# Altium PCB Li-IonBatteryCharger.PcbDoc
Units mil, origin at the board's own origin, x right, y up, seen from the top; angles counter-clockwise.
Board outline 4268 x 1430 mil, 2 copper layers (Top Layer, Bottom Layer); 53 components, 36 nets, 254 pads, 41 vias.
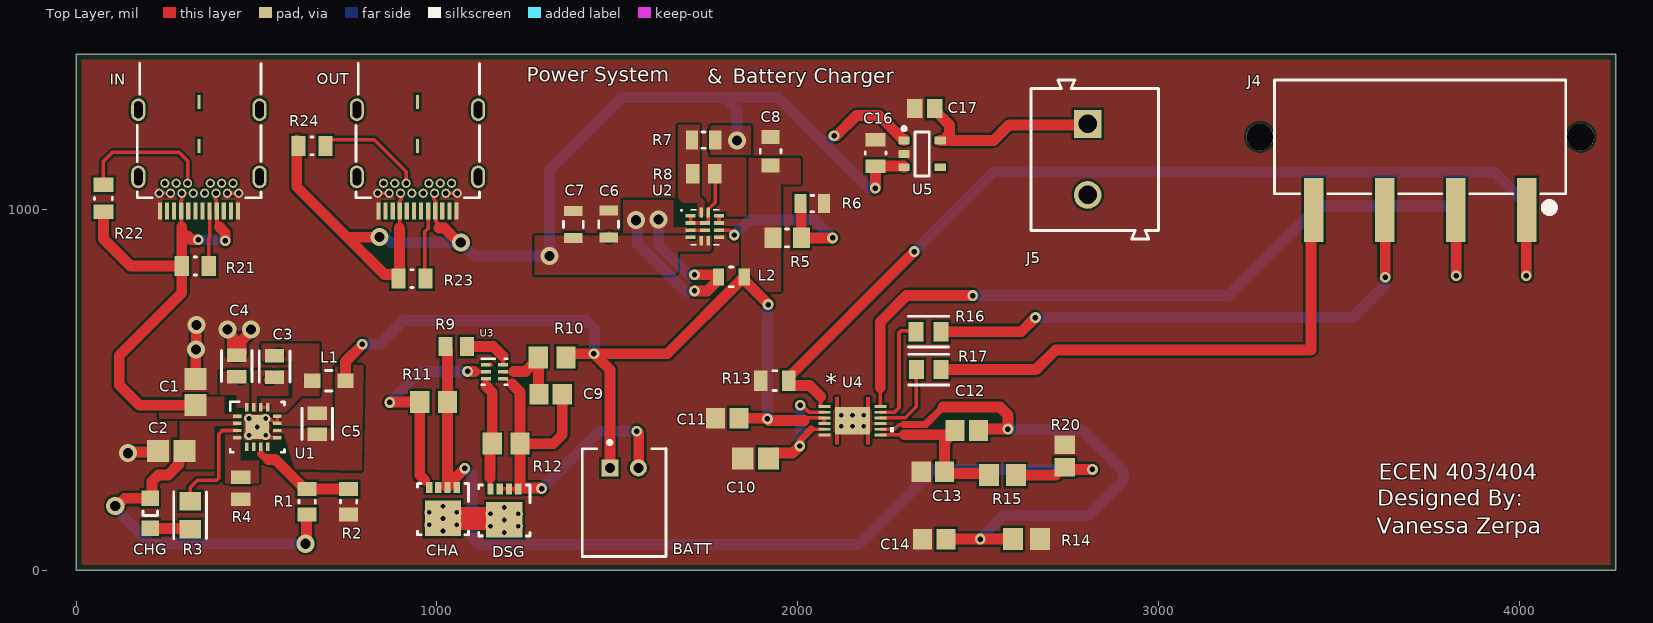
[diagram p0: Top Layer view]
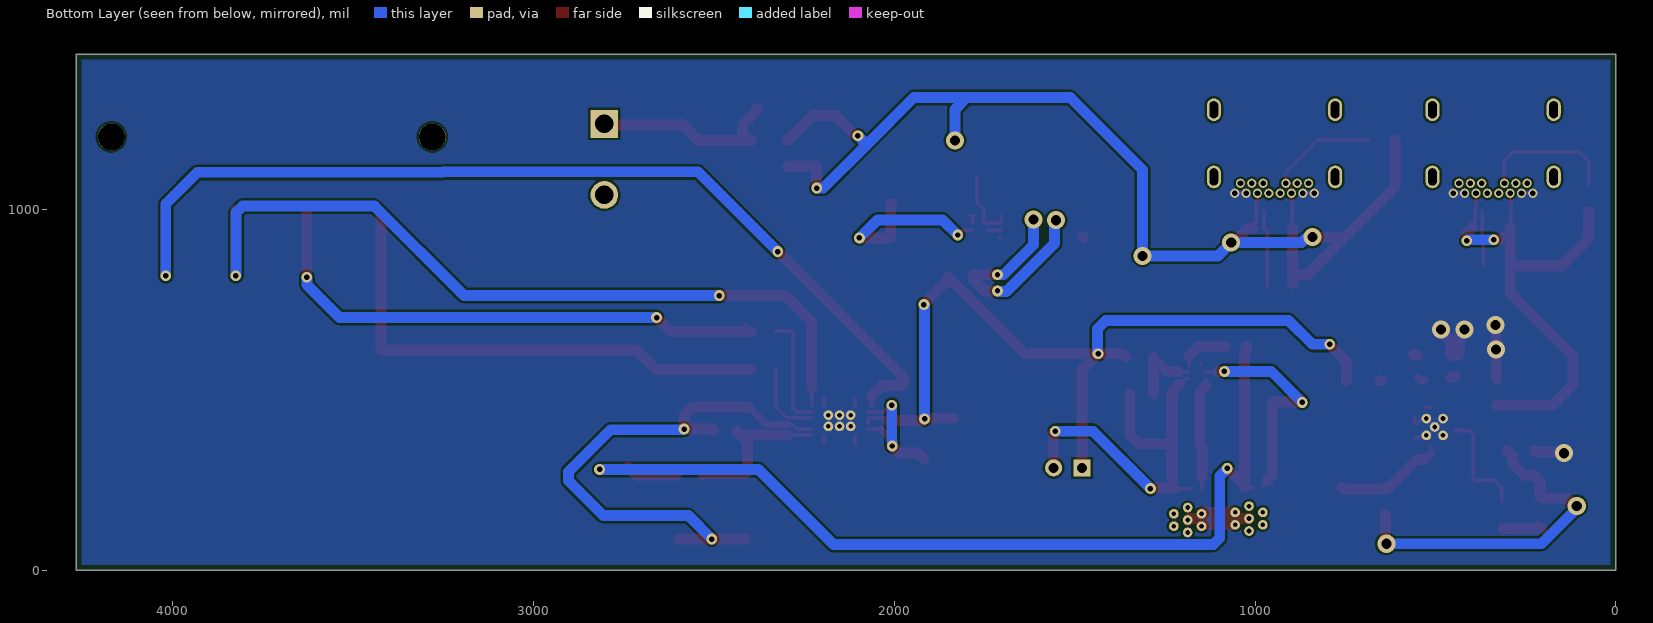
[diagram p1: Bottom Layer view, seen from below]

## Layer stack, top to bottom
Top Solder: solder mask 0.4, Solder Resist, Dk 3.5
Top Layer: signal copper 1.4
Dielectric 1: dielectric 12.6, FR-4, Dk 4.8
Bottom Layer: signal copper 1.4
Bottom Solder: solder mask 0.4, Solder Resist, Dk 3.5

## Board outline
0,0 4268,0 4268,1430 0,1430

## Design rules (kind name [scope] priority, off if disabled: settings)
BoardOutlineClearance [All] p1: gap=15 ignorepadtopadclearanceinfootprint=FALSE
Clearance [All] p1: gap=6 ignorepadtopadclearanceinfootprint=TRUE except(0: Arc-Hole Track-Hole SMDPad-Hole THPad-Hole Via-Hole Fill-Hole Poly-Hole Region-Hole Text-Hole)
ComponentClearance [All] p1: gap=1 collisioncheckmode=3 verticalgap=1 showdistances=FALSE
DiffPairsRouting [All] p1: maxlimit=393.7 minlimit=6 mostfreqgap=8 toplayer_minwidth=6 toplayer_maxwidth=15 toplayer_prefwidth=8 bottomlayer_minwidth=6 bottomlayer_maxwidth=15 bottomlayer_prefwidth=8 maxuncoupledlength=500
HoleSize [All] p1: absolutevalues=TRUE maxlimit=265 minlimit=13 maxpercent=80.000 minpercent=20.000
HoleToHoleClearance [All] p1: gap=10 allowstackedmicrovias=FALSE
MinimumAnnularRing [All] p1: minimumring=4.9
MinimumSolderMaskSliver [All] p1: minsoldermaskwidth=0
PlaneClearance [All] p1: clearance=10
PlaneConnect [All] p1: planeconnectstyle=Direct reliefexpansion=16 reliefentries=4 reliefconductorwidth=6 reliefairgap=6
PolygonConnect [All] p1: connectstyle=Direct reliefconductorwidth=8 reliefentries=4 polygonreliefangle="90 Angle" airgapwidth=6
RoutingCorners [All] p1: cornerstyle=45-Degree minsetback=49.21 maxsetback=49.21
RoutingVias [All] p1: holewidth=15 width=30 viastyle="Through Hole" minholewidth=13 minwidth=27 maxholewidth=100 maxwidth=114
SilkToSilkClearance [All] p1: silktosilkclearance=0
SilkToSolderMaskClearance [IsPad] p1: minsilkscreentomaskgap=6 clearancetoexposedcopper=TRUE
SolderMaskExpansion [All] p1: expansion=2.95 istentingtop=FALSE
Width [All] p1: maxlimit=400 minlimit=6 preferedwidth=8
Width PowerNets [InNetClass('PowerNets')] p2: maxlimit=50 minlimit=10 preferedwidth=20 minimp=50.000000 maximp=50.000000 favimp=50.000000
20 further rules are at their usual default settings.

## Classes and differential pairs
net class PowerNets: GND NetBATT_1 NetCHA_1 NetL2_2 "PWR IN" VOUT
component class "Boost Converter": C6 C7 C8 C16 C17 J5 L2 OUT R5 R6 R7 R8 R23 R24 U2 U5
component class "Battery Protection": BATT C9 CHA DSG R9 R10 R11 R12 U3
component class "Battery Fuel Gauge": C10 C11 C12 C13 C14 J4 R13 R14 R15 R16 R17 R20 U4
component class "Battery Charger": C1 C2 C3 C4 C5 CHG IN L1 R1 R2 R3 R4 R21 R22 U1

## Components (designator, comment, footprint, x,y, rotation, side; value= is the part's Value field where it differs from the comment)
BATT "BAT-" JST-S2B-PH-K-S_V 1519,187 r0 top
C1 "2.2uF" CAPC2013X152X50ML20T25 330,493.58 r270 top
C2 "2.2uF" CAPC2013X152X50ML20T25 263.58,330 r0 top
C3 "47nF" FP-C0805C-DN-MFG 549.68,564.53 r270 top value="47,000 pF"
C4 "10uF" FP-C0805C-DG-MFG 445,565.47 r270 top
C5 "10uF" FP-C0805C-DG-MFG 668,405.47 r90 top
C6 "22uF" FP-GRM21B-0_15-MFG 1476,959 r90 top
C7 "22uF" FP-GRM21B-0_15-MFG 1378,958.42 r90 top
C8 "4.7uF" FP-0805-L_2_01_0_2-W_1_25-MFG 1925,1161.37 r90 top
C9 "100nF" CAPC2013X94X50NL20T25 1315,488 r180 top
C10 "470nF" CAPC2013X140X50ML20T25 1883.57,309 r0 top
C11 "100nF" CAPC2013X94X50NL20T25 1805,421 r0 top
C12 "100nF" CAPC2013X94X50NL20T25 2468.52,387 r0 top
C13 "100nF" CAPC2013X94X50NL20T25 2375,273 r180 top
C14 "100nF" CAPC2013X94X50NL20T25 2378.4,86 r0 top
C16 "1uF" FP-CC0805-0_85-MFG 2216,1156.58 r90 top value="1 uF"
C17 "2.7 uF" CAPC2013X145X50LL20T25 2352.44,1280 r180 top
CHA "CSD16406Q3" DQG0008A#1 1016.61,168.9 r270 top
CHG "CHG" 0805_A 205,157.66 r90 top
DSG "CSD16406Q3" DQG0008A#2 1186.61,164.96 r270 top
IN "632723100011" 632723100011 340,1229.1 r180 top
J4 "Screw top terminal" 691709710304 3726,1201 r180 top
J5 "691101710002" 691101710002 2823.69,1138.57 r270 top
L1 "1uH" FP-LQM21DN_00-MFG 700,525 r0 top
L2 "1.2uH" FP-LQW21HN_00-MFG 1816,813 r180 top
OUT "632723100011" 632723100011 946,1229.1 r180 top
R1 "10k" RESC2013X60X35NL10T20 640,189.57 r270 top
R2 "10k" RESC2013X60X35NL10T20 755,189.57 r90 top
R3 "1k" FP-CRCW0805-HPe3-IPC_A 315.71,152 r90 top
R4 "13.3k" RESC2013X70X40LL20T20 456,226.49 r90 top
R5 "100k" RESC2013X60X35ML10T20 1970.63,921 r180 top
R6 "63.4k" RESC2013X50X30LL20T20 2040.52,1016 r180 top
R7 "750k" RESC2013X50X30LL20T20 1739,1192 r0 top
R8 "143k" RESC2013X70X40LL20T20 1739.49,1099 r180 top
R9 "2.2k" RESC2013X60X40LL20T25 1053.47,620 r0 top
R10 "330" RESC2013X70X40ML20T20 1319,590 r0 top
R11 "5.1M" RESC2013X70X40ML20T20 990.61,466 r180 top
R12 "5.1M" RESC2013X70X40ML20T20 1191.64,350.44 r0 top
R13 "1.8M" FP-CRCW0805-e3-MFG 1936.61,525 r0 top
R14 "100" RESC2013X60X40ML20T25 2634,86 r0 top
R15 "100" RESC2013X60X40ML20T25 2567.4,263 r0 top
R16 "10k" FP-CR0805-IPC_B 2363,661 r0 top
R17 "10k" FP-CR0805-IPC_B 2363.47,556 r0 top
R20 ".01" RESC2013X75X55NL20T20 2740,316.5 r90 top
R21 "56k" FP-CRCW0805-e3-IPC_B 330,843 r0 top
R22 "56k" FP-CRCW0805-e3-IPC_B 75,1030.56 r90 top
R23 "56k" FP-CRCW0805-e3-IPC_B 931,808 r0 top
R24 "56k" FP-CRCW0805-e3-IPC_B 653.56,1176 r0 top
U1 "BQ25303JRTER" RTE0016C 501.77,396.77 r0 top
U2 "MP3423" MP3422GGZ 1742.63,952.47 r0 top
U3 "BQ29700DSER" DSE0006A 1160,550 r0 top
U4 "BQ27510DRZR" DRZ12_1P95X2P45 2152,414 r0 top
U5 "TPS76030DBVR" DBV0005A_L 2345,1154 r0 top

## Footprints (in the part's own frame and the unit in brackets; to place one, negate y for a bottom-side part, rotate by r counter-clockwise, add the part's x,y. Pads: shape width x height; smd on the part's side, far side on the other; paste and mask are expansions set on the pad)
0805_A [mm] "Chip LED, 2-Leads, Body 2.0x1.3mm, IPC Medium Density"
  rect 1.1x1.2 smd: 1(-1.05,0) 2(1.05,0)
  silkscreen extent -0.15,-0.5 0.15,0.5, body extent -1,-0.62 1,0.63, height 0.68
632723100011 [mm] "USB 3.1 Type C Receptacle Horizontal THR"
  rect 0.3x1.2 smd: A1(-2.75,5.93) A2(-2.25,5.93) A3(-1.75,5.93) A4(-1.25,5.93) A5(-0.75,5.93) A6(-0.25,5.93) A7(0.25,5.93) A8(0.75,5.93) A9(1.25,5.93) A10(1.75,5.93) A11(2.25,5.93) A12(2.75,5.93)
  round 0.65 hole 0.4: B1(2.8,4.68) B2(2.4,3.98) B3(1.6,3.98) B4(1.2,4.68) B5(0.8,3.98) B6(0.4,4.68) B7(-0.4,4.68) B8(-0.8,3.98) B9(-1.2,4.68) B10(-1.6,3.98) B11(-2.4,3.98) B12(-2.8,4.68) G1(2,4.68) G2(-2,4.68)
  oval 1x1.6 hole 0.6 slot 1.2 at 90 deg: Shell(-4.27,3.53) Shell(-4.27,-1.2) Shell(4.27,3.53) Shell(4.27,-1.2)
  rect 0.2x1 smd: Shell(0,1.35) Shell(0,-1.75)
  silkscreen extent -4.37,-4.45 4.34,5, body extent -4.37,-5.6 4.37,6.19, height 3.05
691101710002 [mm] "5,00mm - modular - blue - Horizontal entry with pressure clamp - 12,6mm height - 02p"
  rect 1.95x1.95 hole 1.3: 1(-2.5,-0.5)
  round 1.95 hole 1.3: 2(2.5,-0.5)
  silkscreen extent -5.6,-4.5 5.6,4.5, body extent -5.6,-4.5 5.6,4.5, height 12.65
691709710304 [mm] "Horizontal Entry SMT with Pressure Clamp, pitch 5mm, 04p"
  rect 1.4x4.5 smd: 1(-7.5,5.15) 2(-2.5,5.15) 3(2.5,5.15) 4(7.5,5.15)
  round 1.9 hole 1.9 unplated: M1(-11.3,0) M2(11.3,0)
  silkscreen extent -10.25,-4 10.25,5.17, body extent -12,-4 12,7, height 9.95
CAPC2013X94X50NL20T25 [mm] "Chip Capacitor, 2-Leads, Body 2.01x1.25mm, IPC Medium Density"
  rect 1.35x1.45 smd: 1(-0.825,0) 2(0.825,0)
  body extent -1.1,-0.72 1.11,0.72, height 0.94
CAPC2013X140X50ML20T25 [mm] "Chip Capacitor, 2-Leads, Body 2.00x1.25mm, IPC Low Density"
  rect 1.5x1.55 smd: 1(-0.9,0) 2(0.9,0)
  body extent -1.1,-0.72 1.1,0.72, height 1.4
CAPC2013X145X50LL20T25 [mm] "Chip Capacitor, 2-Leads, Body 2.00x1.25mm, IPC High Density"
  rect 1.1x1.35 smd: 1(-0.7,0) 2(0.7,0)
  body extent -1.1,-0.72 1.1,0.72, height 1.45
CAPC2013X152X50ML20T25 [mm] "Chip Capacitor, 2-Leads, Body 2.01x1.25mm, IPC Low Density"
  rect 1.55x1.55 smd: 1(-0.925,0) 2(0.925,0)
  body extent -1.1,-0.72 1.11,0.72, height 1.52
DBV0005A_L [mm] "SOT23, 5-Leads, Body 3.05x1.75mm, Pitch 0.95mm, IPC High Density"
  rrect18% 0.8x0.55 smd: 1(-1.275,0.95) 2(-1.275,0) 3(-1.275,-0.95) 4(1.275,-0.95) 5(1.275,0.95)
  silkscreen extent -1.4,-1.55 0.5,1.9, body extent -1.42,-1.46 1.42,1.46, height 1.08
DQG0008A#1 [mm]
  rect 0.75x0.44 smd paste-0.05 mask-0.051: 1(-1.525,0.975) 2(-1.525,0.325) 3(-1.525,-0.325) 4(-1.525,-0.975) 5(1.525,-0.975) 6(1.525,-0.325) 7(1.525,0.325) 8(1.525,0.975)
  rect 2.5x2.55 smd paste-1.262 mask-1.257: 9(0.65,0)
  round 0.686 hole 0.33: V(-0.212,0)
  round 0.686 hole 0.33 mask-0.102: V(0.226,0.975) V(1.102,0.975) V(1.102,-0.975)
  round 0.686 hole 0.33 mask+0.075: V(0.226,-0.975)
  round 0.686 hole 0.33 mask+0.051: V(0.664,0) V(1.54,0)
  silkscreen extent -1.8,-1.8 1.8,1.8, body extent -1.65,-1.65 1.65,1.65, height 1.1
DQG0008A#2 [mm]
  rect 0.75x0.44 smd paste-0.05 mask-0.051: 1(-1.525,0.975) 2(-1.525,0.325) 3(-1.525,-0.325) 4(-1.525,-0.975) 5(1.525,-0.975) 6(1.525,-0.325) 7(1.525,0.325) 8(1.525,0.975)
  rect 2.5x2.55 smd paste-1.262 mask-1.257: 9(0.65,0)
  round 0.686 hole 0.33 mask+0.051: V(-0.212,0) V(0.664,0) V(1.54,0)
  round 0.686 hole 0.33 mask-0.102: V(0.226,0.975) V(0.226,-0.975) V(1.102,0.975) V(1.102,-0.975)
  silkscreen extent -1.8,-1.8 1.8,1.8, body extent -1.65,-1.65 1.65,1.65, height 1.1
DRZ12_1P95X2P45 [mil]
  rect 33.46x7.87 smd paste-16.23: 1(-77.99,39.37) 2(-77.99,23.62) 3(-77.99,7.87) 4(-77.99,-7.87) 5(-77.99,-23.62) 6(-77.99,-39.37) 7(77.99,-39.37) 8(77.99,-23.62) 9(77.99,-7.87) 10(77.99,7.87) 11(77.99,23.62) 12(77.99,39.37)
  rect 96.46x76.77 smd paste-47.73 mask-47.5: 13(0,0)
  round 27 hole 13: V(-31,-15.5) V(-31,15.5) V(0,-15.5) V(0,15.5) V(31,-15.5) V(31,15.5)
  Top Layer region: 0,38.39 0,38.39 0,38.39 0,38.39 0,38.39 0,38.39 0,38.39 0,38.39
  Top Layer region: 0,-38.39 0,-38.39 0,-38.39 0,-38.39 0,-38.39 0,-38.39 0,-38.39 0,-38.39
  Top Layer region: 48.23,38.39 38.39,38.39 38.39,64.96 48.23,64.96
  Top Layer region: -48.23,38.39 -38.39,38.39 -38.39,64.96 -48.23,64.96
  Top Layer region: -48.23,-38.39 -38.39,-38.39 -38.39,-64.96 -48.23,-64.96
  Top Layer region: 48.23,-38.39 38.39,-38.39 38.39,-64.96 48.23,-64.96
  silkscreen extent 105,-32 115,-18, body extent -79,-49 79,49, height 39
DSE0006A [mm]
  rect 0.66x0.25 smd paste+0 mask+0.051: 1(-0.62,0.5)
  rect 0.7x0.25 smd paste+0 mask+0.051: 2(-0.6,0) 3(-0.6,-0.5) 4(0.6,-0.5) 5(0.6,0) 6(0.6,0.5)
  Top Layer region: -0.3,0.375 -0.3,0.625 -0.25,0.625 -0.15,0.525 -0.15,0.375
  silkscreen extent -0.9,-0.92 0.9,0.92, body extent -0.75,-0.74 0.75,0.76, height 0.77
FP-0805-L_2_01_0_2-W_1_25-MFG [mm]
  rect 1x1.25 smd paste+0 mask+0: 1(-1,0) 2(1,0)
  silkscreen extent -0.13,-0.72 0.13,0.72, body extent -1.6,-0.82 1.6,0.82, height 0.25
FP-C0805C-DG-MFG [mm]
  rect 0.95x1.35 smd paste+0 mask+0: 1(-0.75,0) 2(0.75,0)
  silkscreen extent -1.11,-1.08 1.1,1.07, body extent -1.4,-0.85 1.4,0.85, height 0.25
FP-C0805C-DN-MFG [mm]
  rect 0.95x1.35 smd paste+0 mask+0: 1(-0.75,0) 2(0.75,0)
  silkscreen extent -1.1,-1.07 1.1,1.07, body extent -1.4,-0.85 1.4,0.85, height 0.25
FP-CC0805-0_85-MFG [mm]
  rect 0.95x1.4 smd paste+0 mask+0: 1(-0.925,0) 2(0.925,0)
  silkscreen extent -0.08,-0.72 0.08,0.72, body extent -1.6,-1.05 1.6,1.05, height 0.25
FP-CR0805-IPC_B [mil]
  rect 41.66x53.63 smd paste+0 mask+0: 1(-34.53,0) 2(34.53,0)
  silkscreen extent -55,-43 55,43, body extent -65,-37 65,37, height 10
FP-CRCW0805-e3-IPC_B [mil]
  rect 39.63x55.44 smd paste+0 mask+0: 1(-37.44,0) 2(37.44,0)
  silkscreen extent -3,-25 3,25, body extent -67,-38 67,38, height 10
FP-CRCW0805-e3-MFG [mm]
  rect 0.95x1.45 smd paste+0 mask+0: 1(-0.975,0) 2(0.975,0)
  silkscreen extent -0.13,-0.7 0.13,0.7, body extent -1.55,-0.82 1.55,0.82, height 0.25
FP-CRCW0805-HPe3-IPC_A [mil]
  rect 51.42x59.38 smd paste+0 mask+0: 1(-38.43,0) 2(38.43,0)
  silkscreen extent -64,-45 64,45, body extent -84,-49 84,49, height 10
FP-GRM21B-0_15-MFG [mm]
  rect 0.7x1.3 smd paste+0 mask+0: 1(-0.95,0) 2(0.95,0)
  silkscreen extent -0.23,-0.7 0.23,0.7, body extent -1.4,-0.8 1.4,0.8, height 0.25
FP-LQM21DN_00-MFG [mm]
  rect 1.15x1 smd paste+0 mask+0: 1(-1.175,0) 2(1.175,0)
  silkscreen extent -0.23,-0.72 0.23,0.72, body extent -1.85,-0.82 1.85,0.82, height 0.25
FP-LQW21HN_00-MFG [mm]
  rect 0.8x1.2 smd paste+0 mask+0: 1(-0.9,0) 2(0.9,0)
  silkscreen extent -0.13,-0.7 0.13,0.7, body extent -1.4,-0.8 1.4,0.8, height 0.25
JST-S2B-PH-K-S_V [mm] "THD, 2-Leads, Body 7.6x5.9mm, Pitch 2mm"
  rect 1.2x1.2 hole 0.7: 1(-1,2.45)
  round 1.2 hole 0.7: 2(1,2.45)
  silkscreen extent -2.95,-3.8 2.95,4.35, body extent -2.95,-3.8 2.95,3.8, height 4.8
MP3422GGZ [mm]
  rect 0.7x0.25 smd: 1(-1,0.75) 2(-1,0.25) 3(-1,-0.25) 4(-1,-0.75) 7(1,-0.75) 8(1,-0.25) 9(1,0.25) 10(1,0.75) 13(0,0.25) 14(0,-0.25)
  rect 0.25x0.7 smd: 5(-0.25,-1) 6(0.25,-1) 11(0.25,1) 12(-0.25,1)
  silkscreen extent -1.7,-1.27 1,1.19, body extent -1,-1 1,1, height 1.1
RESC2013X50X30LL20T20 [mm] "Chip Resistor, 2-Leads, Body 2.00x1.25mm, IPC High Density"
  rect 0.85x1.35 smd: 1(-0.825,0) 2(0.825,0)
  silkscreen extent -0.1,-0.58 0.1,0.58, body extent -1.1,-0.72 1.1,0.72, height 0.5
RESC2013X60X35ML10T20 [mm] "Chip Resistor, 2-Leads, Body 2.1x1.35mm, IPC Low Density"
  rect 1.2x1.45 smd: 1(-1,0) 2(1,0)
  silkscreen extent -0.1,-0.63 0.1,0.63, body extent -1.05,-0.68 1.05,0.67, height 0.6
RESC2013X60X35NL10T20 [mm] "Chip Resistor, 2-Leads, Body 2.1x1.35mm, IPC Medium Density"
  rect 1x1.35 smd: 1(-0.9,0) 2(0.9,0)
  silkscreen extent -0.1,-0.58 0.1,0.58, body extent -1.05,-0.68 1.05,0.67, height 0.6
RESC2013X60X40LL20T25 [mm] "Chip Resistor, 2-Leads, Body 2.00x1.25mm, IPC High Density"
  rect 1x1.35 smd: 1(-0.75,0) 2(0.75,0)
  body extent -1.1,-0.72 1.1,0.72, height 0.6
RESC2013X60X40ML20T25 [mm] "Chip Resistor, 2-Leads, Body 2.00x1.25mm, IPC Low Density"
  rect 1.4x1.55 smd: 1(-0.95,0) 2(0.95,0)
  body extent -1.1,-0.72 1.1,0.72, height 0.6
RESC2013X70X40LL20T20 [mm] "Chip Resistor, 2-Leads, Body 2.00x1.25mm, IPC High Density"
  rect 0.95x1.35 smd: 1(-0.775,0) 2(0.775,0)
  body extent -1.1,-0.72 1.1,0.72, height 0.7
RESC2013X70X40ML20T20 [mm] "Chip Resistor, 2-Leads, Body 2.00x1.25mm, IPC Low Density"
  rect 1.35x1.55 smd: 1(-0.975,0) 2(0.975,0)
  body extent -1.1,-0.72 1.1,0.72, height 0.7
RESC2013X75X55NL20T20 [mm] "Chip Resistor, 2-Leads, Body 2.00x1.25mm, IPC Medium Density"
  rect 1.3x1.45 smd: 1(-0.8,0) 2(0.8,0)
  body extent -1.1,-0.72 1.1,0.72, height 0.75
RTE0016C [mm]
  rect 0.6x0.24 smd paste+0 mask+0.051: 1(-1.4,0.75) 2(-1.4,0.25) 3(-1.4,-0.25) 4(-1.4,-0.75) 9(1.4,-0.75) 10(1.4,-0.25) 11(1.4,0.25) 12(1.4,0.75)
  rect 0.24x0.6 smd paste+0 mask+0.051: 5(-0.75,-1.4) 6(-0.25,-1.4) 7(0.25,-1.4) 8(0.75,-1.4) 13(0.75,1.4) 14(0.25,1.4) 15(-0.25,1.4) 16(-0.75,1.4)
  rect 1.68x1.68 smd paste-0.827 mask+0.051: 17(0,0)
  round 0.686 hole 0.33 mask+0.051: 18(0.59,0.59) 19(0.59,-0.59) 20(-0.59,-0.59) 21(-0.59,0.59) 22(0,0)
  silkscreen extent -1.91,-1.78 1.91,1.78, body extent -1.5,-1.5 1.5,1.5, height 0.8

## Part data
BATT: library part CMP-1755-00004-1, "Male Header, Pitch 2 mm, 1 x 2 Position, Height 4.8 mm, Tail Length 3.4 mm, -25 to 85 degC, RoHS, Bulk", Capacitance="10 uF", Case\Package=Radial, Max Operating Temperature="85 degC", Min Operating Temperature="-40 degC", Package Quantity=200, Tolerance=20%, Voltage Rating="50 V", ComponentLink1Description=Datasheet, ComponentLink1URL=http://www.jst-mfg.com/product/pdf/eng/ePH.pdf, DatasheetVersion=Dec-12, Diameter="5 mm", Height="11 mm", Lead Pitch="2 mm", Length="11 mm", Mount="Through Hole", PackageDescription="Male Header, Pitch 2 mm, 1 x 2 Position, Height 4.8 mm, Tail Length 3.4 mm", PackageReference=S2B-PH-K-S, Packaging=Bulk, Pins=2, Radiation Hardening=No, REACH SVHC="No SVHC", RoHSCompliant=true, Voltage Rating (DC)="50 V"
C1 C2: library part CMP-2007-04514-1, Manufacturer="AVX Interconnect / Elco", Part Number=08053C225KAT2A
C3: library part CMP-2007-03315-2, "CAP CER 0.047UF 25V 5% NP0 0805", Capacitance="47,000 pF", Manufacturer=KEMET, Manufacturer Part Number=C0805C473J3GACTU, Package=C0805C-DN, Temperature="-55°C to +125°C", Temperature Characteristic=C0G, Temperature Coefficient=30ppm/°C, Temperature Range High=+125°C, Temperature Range Low=-55°C, Tolerance=0.05, Voltage Rating="25 V", Automotive=No, Category=Cap, ComponentLink2Description=Datasheet, ComponentLink2URL=https://content.kemet.com/datasheets/KEM_C1003_C0G_SMD.pdf, Device Class L1="Passive Components", Device Class L2=Capacitors, Device Class L3="Ceramic Capacitors", Digikey Description="CAP CER 0.047UF 25V 5% NP0 0805", Height=0.88mm, Ipc Land Pattern Name=CAPC200125X78, Lead Free=Yes, Material=Ceramic, Mouser Description="Multilayer Ceramic Capacitors MLCC - SMD/SMT 25volts 0.047uF 5% C0G", Octopart=https://octopart.com/c0805c473j3gactu-kemet-9563153, RoHS=TRUE
C4 C5: library part CMP-2007-03243-2, "CAP CER 10UF 10V X5R 0805", 3DS Part Number=220-00001, Manufacturer=Kemet, Manufacturer Part Number=C0805C106K8PACTU, Package=C0805C-DG, Temperature="-55°C to +85°C", Temperature Characteristic=X5R, Temperature Coefficient=15%, Temperature Range High=+85°C, Temperature Range Low=-55°C, Tolerance=10%, Voltage=10V, Automotive=No, Capacitance=10uF, Category=Cap, ComponentLink2Description=Datasheet, ComponentLink2URL=https://content.kemet.com/datasheets/KEM_C1006_X5R_SMD.pdf, Device Class L1="Passive Components", Device Class L2=Capacitors, Device Class L3="Ceramic Capacitors", Digikey Description="CAP CER 10UF 10V X5R 0805", Height=1.4mm, Ipc Land Pattern Name=CAPC200125X125, Lead Free=Yes, Material=Ceramic, Mouser Description="CAP CER 10UF 10V X5R 0805", Octopart=https://octopart.com/c0805c106k8pactu-kemet-98697, RoHS=TRUE, Voltage Rating=10V
C6 C7: library part CMP-2007-03385-2, "Chip Multilayer Ceramic Capacitors for General Purpose, 0805, 22uF, X5R, 15%, 20%, 6.3V", Case Code (Imperial)=0805, Case Code (Metric)=2012, Dielectric=X5R, Max Operating Temperature=85°C, Min Operating Temperature=-55°C, Package Quantity=1, Tolerance=20%, Voltage=6.3V, Capacitance=22uF, Case/Package=0805, Depth=1.25mm, Height=1.25mm, Lead Free="Lead Free", Length=2mm, Material=Ceramic, Mount="Surface Mount", Packaging="Tape and Reel", Radiation Hardening=No, REACH SVHC="No SVHC", Termination=SMD/SMT, Thickness=0.053inch, Voltage Rating=6.3V, Voltage Rating (DC)=6.3V, Width=0.049inch
C8: library part CMP-2007-04518-2, "General Purpose Ceramic Capacitor, 0805, 4.7uF, 10%, X7R, 15%, 16V", Case Code (Imperial)=0805, Case Code (Metric)=2012, Dielectric=X7R, Max Operating Temperature=125°C, Min Operating Temperature=-55°C, Package Quantity=1, Tolerance=10%, Voltage=10V, Voltage Rating=16V, Capacitance=4.7uF, Case/Package=0805, Construction=Flat, Contact Plating=Tin, Depth=1.25mm, Dissipation Factor=3.5%, Height=1.52mm, Lead Free="Lead Free", Length=2.01mm, Mount="Surface Mount", Number of Pins=2, Packaging="Tape and Reel", Radiation Hardening=No, REACH SVHC="No SVHC", RoHS Compliant=Yes, Series=-, Termination=SMD/SMT, Thickness=0.06inch, Voltage Rating (DC)=16V, Width=0.049inch
C9 C11 C12 C13 C14: library part CMP-1036-04419-2, Manufacturer="AVX Interconnect / Elco", Part Number=08055C104KAT4A
C10: library part CMP-2007-04613-1, Manufacturer="AVX Interconnect / Elco", Part Number=08053D474KAT2A
C16: library part CMP-03422-000182-1, "CAP CER 1UF 10V X7R 0805", Capacitance="1 uF", Manufacturer=Yageo, Manufacturer Part Number=CC0805KKX7R6BB105, Package=CC0805-0.85, Temperature="-30°C to +85°C", Temperature Characteristic=X7R, Temperature Range High=+85°C, Temperature Range Low=-30°C, Tolerance=0.1, Voltage Rating="10 V", Automotive=No, Category=Cap, ComponentLink2Description=Datasheet, ComponentLink2URL=http://www.yageo.com/documents/recent/UPY-GPHC_Y5V_6.3V-to-50V_8.pdf, Device Class L1="Passive Components", Device Class L2=Capacitors, Device Class L3="Ceramic Capacitors", Digikey Description="CAP CER 1UF 10V X7R 0805", Footprint Url=http://www.yageo.com/exep/pages/download/literatures/UPY-C_GEN_24.pdf, Height=0.95mm, Ipc Land Pattern Name=CAPC200125X85, Lead Free=Yes, Material=Ceramic, Mouser Description="Multilayer Ceramic Capacitors MLCC - SMD/SMT 1.0uF 10V X7R 10%", Octopart=https://octopart.com/cc0805kkx7r6bb105-yageo-42522859, RoHS=TRUE
C17: library part CMP-1036-04849-2, Manufacturer=Kemet, Part Number=C0805C275K8PACTU
CHA DSG U3 U4: "No Description Available", Mfr_Name="Texas Instruments", Copyright="Copyright (C) 2021 Ultra Librarian. All rights reserved.", RefDes=RefDes, Type=DEV
  CHA DSG: Manufacturer_Part_Number=CSD16406Q3
  U3: Manufacturer_Part_Number=BQ29700DSER
  U4: Manufacturer_Part_Number=BQ27510DRZR
CHG: library part CMP-1426-00011-1, "SMD mono-color Chip LED, WL-SMCW, Red", Color=Red, Manufacturer="Wuerth Elektronik", PartNumber=150080RS75000, ComponentLink1Description="Manufacturer URL", ComponentLink1URL=http://www.we-online.com, ComponentLink2Description=Datasheet, ComponentLink2URL=http://katalog.we-online.com/led/datasheet/150080RS75000.pdf, PackageReference=0805_A
IN OUT: library part CMP-1502-03213-1, "USB 3.1 Type C Receptacle WR-COM, Horizontal, SMT / THT", Contact Resistance=30mOhm, Manufacturer="Wurth Elektronik", Operating Temperature=-40to105degC, Rated Current=5A, Working Voltage=20VDC, Connector Type=USB3.1TypeC, Datasheet URL=https://katalog.we-online.de/em/datasheet/632723x00011%282%29.pdf, Gender=Receptacle, Manufacturer URL=http://www.we-online.de, Mounting Technology=SMT/THT, Orientation=Horizontal, Package Reference=632723100011, Packaging=TapeandReel, Part Number=632723100011, Publisher=WurthElektronik
J4: library part CMP-1502-03337-1, "Serie 7097 - 5.00 mm Horizontal Entry SMT with Pressure Clamp WR-TBL, 4 pin", Manufacturer="Wurth Elektronik", Operating Temperature=-45to130degC, Package Reference=691709710304, Datasheet URL=http://katalog.we-online.de/em/datasheet/6917097103xx.pdf, Manufacturer URL=http://www.we-online.de, Mounting Technology=SMT, Packaging=TapeandReelwithCap, Part Number=691709710304, Pin Number=4, Pitch=5.00mm, Publisher=WurthElektronik
J5: library part CMP-1502-03256-1, "Series 101 - 5.00 mm Horizontal Entry Modular with Pressure Clamp WR-TBL, 2 pin", Manufacturer="Wurth Elektronik", Operating Temperature=-40to105degC, Datasheet URL=http://katalog.we-online.de/em/datasheet/6911017100xx.pdf, Manufacturer URL=http://www.we-online.de, Mounting Technology=THT, Package Reference=691101710002, Packaging=Box, Part Number=691101710002, Pin Number=2, Pitch=5.00mm, Publisher=WurthElektronik
L1: library part CMP-06042-012978-1, "Multilayer Type Inductor for General Circuits, 0805 (2012), 1μH, 10%, 0.4Ω, 50mA", Case Code (Imperial)=0805, Case Code (Metric)=2012, Current Rating=50mA, DC Resistance (DCR)=400mR, Inductance Tolerance=10%, Max Operating Temperature=85°C, Min Operating Temperature=-40°C, Package Quantity=1, Self Resonant Frequency=107MHz, Test Frequency=10MHz, Case/Package=0805, Core Material=Ferrite, DC Current=50mA, Depth=1.45mm, Height=0.85mm, Height - Seated (Max)=0.041inch, Inductance=1uH, Lead Free="Lead Free", Length=2mm, Max DC Current=50mA, Military Standard=Not, Mount="Surface Mount", Packaging="Tape and Reel", Q Factor=45, Radiation Hardening=No, REACH SVHC="No SVHC", Shielding=Shielded, Termination=SMD/SMT, Tolerance=10%, Width=1.25mm
L2: library part CMP-06042-002176-1, "Wire Wound Ferrite type RF Inuctor 1.2uH ±5% 100mA 3.12Ω 0805 (2012)", Case Code (Imperial)=0805, Case Code (Metric)=2012, Current Rating=100mA, DC Resistance (DCR)=3.12R, Max Operating Temperature=85°C, Min Operating Temperature=-55°C, Package Quantity=3000, Resistor Type=Wirewound, Self Resonant Frequency=400MHz, Test Frequency=10MHz, Tolerance=5%, Case/Package=0805, Core Material=Ferrite, DC Current=100mA, Depth=1.4mm, Height=0.9mm, Height - Seated (Max)=0.039inch, Inductance=1.2uH, Lead Free="Lead Free", Length=2mm, Max DC Current=100mA, Military Standard=Not, Mount="Surface Mount", Packaging="Tape and Reel", Q Factor=35, Radiation Hardening=No, Shielding=Unshielded, Termination=SMD/SMT, Weight=0.000282oz, Width=1.5mm
R1 R2: library part CMP-1659-00013-4, "Chip Resistor, 10 KOhm, +/- 1%, 0.125 W, -55 to 155 degC, 0805 (2012 Metric), RoHS, Tape and Reel", Manufacturer=Yageo, Max Operating Temperature="155 degC", Min Operating Temperature="-55 degC", Package Quantity=5000, Voltage Rating="150 V", ComponentLink1Description="Manufacturer URL", ComponentLink1URL=http://www.yageo.com/, ComponentLink2Description=Datasheet, ComponentLink2URL=http://www.yageo.com/documents/recent/PYu-RC_Group_51_RoHS_L_04.pdf, DatasheetVersion="Rev. 4, 02/2016", Height="0.5 mm", Length="2 mm", Mount="Surface Mount", Mounting Technology="Surface Mount", PackageDescription="2-Pin Surface Mounted Device, Body 2 x 1.25 mm", PackageReference=0805, Packaging="Tape and Reel", Pins=2, REACH SVHC="No SVHC", RoHSCompliant=true
R3: library part CMP-02407-004529-1, "RES Thick Film, 1kΩ, 1%, 0.5W, 100ppm/°C, 0805", Case Code (Imperial)=0805, Case Code (Metric)=2012, Max Operating Temperature=155°C, Min Operating Temperature=-55°C, Package Quantity=5000, Power Rating=330mW, Resistance=1kR, Temperature Coefficient=100ppm/°C, Tolerance=1%, Voltage Rating=150V, Case/Package=0805, Composition="Thick Film", Contact Plating=Tin, Depth=1.25mm, Height=0.5mm, Lead Free="Lead Free", Length=2mm, Military Standard=Not, Mount="Surface Mount", Number of Pins=2, Packaging="Tape and Reel", Radiation Hardening=No, Termination=Solder, Voltage Rating (DC)=150V, Weight=0.000194oz, Width=1.2mm
R4: library part CMP-2001-04421-1, Manufacturer=Panasonic, Part Number=ERJ-6ENF1332V
R5: library part CMP-2100-03668-1, "Chip Resistor, 100 KOhm, +/- 1%, 0.125 W, -55 to 155 degC, 0805 (2012 Metric), RoHS, Tape and Reel", Case Code (Imperial)=0805, Case Code (Metric)=2012, Manufacturer=Yageo, Max Operating Temperature=155degC, Max Power Dissipation=125mW, Min Operating Temperature=-55degC, Package Description="2-Pin Surface Mounted Device, Body 2 x 1.25 mm", Package Quantity=1, Resistance=100KOhm, Temperature Coefficient=100ppm/degreesC, Tolerance=1%, Voltage Rating=150V, Case/Package=0805, Composition=ThickFilm, Datasheet URL=http://www.yageo.com/NewPortal/yageodocoutput?fileName=/pdf/R-Chip/PYu-RC_Group_51_RoHS_L_5.pdf, Datasheet Version="Rev. 5, 10/2016", Depth=1.25mm, Height=0.024inch, Lead Free=LeadFree, Lead Pitch=0.4mm, Length=2mm, Manufacturer URL=http://www.yageo.com/, Military Standard=Not, Number of Pins=2, Number of Terminations=2, Package Reference=0805, Packaging=TapeandReel, Power Rating=125mW, REACH SVHC=Unknown, RoHSCompliant=true, Termination=SMD/SMT, Voltage Rating (DC)=150V, Width=0.049inch
R6: library part CMP-2001-04057-1, Manufacturer="Vishay Dale", Part Number=CRCW080563K4FKEA
R7: library part CMP-2001-04102-1, Manufacturer="Vishay Dale", Part Number=CRCW0805750KFKEA
R8: library part CMP-2001-04433-1, Manufacturer=Panasonic, Part Number=ERJ-6ENF1433V
R9: library part CMP-2001-00613-1, Manufacturer=Panasonic, Part Number=ERA6AEB222V
R10: library part CMP-1013-00062-2, Manufacturer=Panasonic, Part Number=ERJ-6GEYJ331V
R11 R12: library part CMP-2001-00430-1, Manufacturer=Panasonic, Part Number=ERJ-6GEYJ515V
R13: library part CMP-2001-03646-2, "RES Thick Film, 1.8MΩ, 5%, 0.125W, 200ppm/°C, 0805", Case Code (Imperial)=0805, Case Code (Metric)=2012, Max Operating Temperature=155°C, Max Power Dissipation=125mW, Min Operating Temperature=-55°C, Package Quantity=1, Resistance=1.8MR, Temperature Coefficient=200ppm/°C, Tolerance=5%, Voltage Rating=150V, Case/Package=0805, Composition="Thick Film", Contact Plating=Tin, Depth=1.25mm, Features="Automotive AEC-Q200", Height=0.02inch, Lead Free="Lead Free", Length=2mm, Military Standard=Not, Number of Terminations=2, Packaging="Tape and Reel", Power Rating=125mW, Radiation Hardening=No, Termination=SMD/SMT, Voltage Rating (DC)=150V, Weight=0.000194oz, Width=1.25mm
R14 R15: library part CMP-2001-00580-1, Manufacturer=Panasonic, Part Number=ERA6AEB101V
R16 R17: library part CMP-07231-003873-1, "Thick Film Chip Resistors 0805 10kΩ 0.125W 5% 200ppm/°C", Case Code (Imperial)=0805, Case Code (Metric)=2012, Max Operating Temperature=155°C, Max Power Dissipation=125mW, Min Operating Temperature=-55°C, Package Quantity=1, Resistance=10kR, Temperature Coefficient=200ppm/°C, Tolerance=5%, Voltage Rating=150V, Voltage Rating (DC)=100V, Case/Package=0805, Composition="Thick Film", Contact Plating=Tin, Depth=1.25mm, Features="Moisture Resistant", Height=0.5mm, Length=2mm, Military Standard=Not, Mount="Surface Mount", Number of Pins=2, Number of Terminations=2, Packaging="Tape and Reel", Power Rating=125mW, Radiation Hardening=No, REACH SVHC="No SVHC", Termination=SMD/SMT, Thickness=508um, Width=1.25mm
R20: library part CMP-2001-04363-1, Manufacturer=Panasonic, Part Number=ERJ-6BWFR010V
R21 R22 R23 R24: library part CMP-2001-04015-2, "RES Thick Film, 56kΩ, 1%, 0.125W, 100ppm/°C, 0805", Case Code (Imperial)=0805, Case Code (Metric)=2012, Max Operating Temperature=155°C, Max Power Dissipation=125mW, Min Operating Temperature=-55°C, Package Quantity=10, Resistance=56kR, Temperature Coefficient=100ppm/°C, Tolerance=1%, Voltage Rating=150V, Case/Package=0805, Composition="Thick Film", Contact Plating=Tin, Depth=1.25mm, Features="Automotive AEC-Q200", Height=0.45mm, Lead Free="Lead Free", Length=2mm, Military Standard=Not, Mount="Surface Mount", Number of Pins=2, Number of Terminations=2, Packaging="Tape and Reel", Power Rating=125mW, Radiation Hardening=No, Termination=SMD/SMT, Voltage Rating (DC)=150V, Weight=0.000194oz, Width=1.25mm
U1: "Standalone 1-cell 17-V, 3.0-A battery charger with JEITA battery temperature monitoring 16-WQFN -40 to 85", Manufacturer="Texas Instruments", Supplier Part Number 1=595-BQ25303JRTER, Category="Integrated Circuits (ICs)", Copyright="Copyright (C) 2021 Ultra Librarian. All rights reserved.", Manufacturer Part Number=BQ25303JRTER, Manufacturer_Part_Number=BQ25303JRTER, Mfr_Name="Texas Instruments", Pricing 1="1=2.18000, 10=1.97000, 25=1.86000, 50=1.86000, 100=1.59000, 250=1.49000, 500=1.30000, 1000=1.08000, 3000=1.07000, 10000=1.07000 (USD)", RefDes=RefDes, RoHS=Yes, Stock 1=48, Supplier 1=Mouser, Type=DEV
U5: library part CMP-0394-00493-2, "Single Output LDO, 50 mA, Fixed 3 V Output, 3.2 to 16 V Input, with Low IQ, 5-pin SOT-23 (DBV), -40 to 125 degC, Green (RoHS & no Sb/Br)", Manufacturer="Texas Instruments", Rating=Catalog, Accuracy(%)=2, Code_JEDEC=MO-178, ComponentLink1Description="Manufacturer URL", ComponentLink1URL=http://www.ti.com/, ComponentLink2Description=Datasheet, ComponentLink2URL=http://www.ti.com/general/docs/lit/getliterature.tsp?genericPartNumber=TPS76030&fileType=pdf, ComponentLink3Description="Package Specification", ComponentLink3URL=http://www.ti.com/litv/pdf/mpds018i, DatasheetVersion=SLVS144D, Eco-Plan="Green (RoHS & no Sb/Br)", Fixed Output Options(V)=3, Iout(Max)(A)=0.05, Iq(Typ)(mA)=0.8, Mounting Technology="Surface Mount", PackageDescription="5-Pin Plastic Small Outline, Body 1.60 Ãƒâ€” 2.90 mm, Pitch 0.95 mm", PackageReference=DBV0005A, PackageVersion=4073253-4/K, PartNumber=TPS76030DBVR, SubFamily="Single Channel LDO", Vdo(Typ)(mV)=120, Vin(Max)(V)=16, Vin(Min)(V)=3.2, Vout Adj(Max)(V)=3, Vout Adj(Min)(V)=3

## Via types
v1: diameter 30, hole 15, Top Layer to Bottom Layer, 28 vias
v2: diameter 50, hole 28, Top Layer to Bottom Layer, 13 vias

## Nets (pads, with @x,y where several pads share a name; then routed paths per layer and width w, separated by ;. In a path a pad name is that pad's centre, name@x,y a point inside that pad or via, vN(x,y) a via of type N, cw(c..) or ccw(c..) an arc to the next point about the centre after c; other vN are vias at no path point)
CC1_IN: IN.A5 R21.2 | length 153.2
  Top Layer w10: R21.2@366.96,843.47 366.96,920.09 369.53,922.65 IN.A5
CC1IN: OUT.A5 R23.2 | length 211.2
  Top Layer w10: R23.2@966,788.79 966,938 976,948 976,995.17 OUT.A5
CC2_IN: IN.B5 R22.2 | length 380.7
  Top Layer w10: R22.2 75,1133 100,1158 285,1158 308.5,1134.5 IN.B5
CC2IN: OUT.B5 R24.2 | length 297.3
  Top Layer w10: R24.2@686,1193 826,1193 914.5,1104.5 OUT.B5
GND: C1.1 C2.1 C4.1 C5.2 C6.2 C7.2 C8.2 C10.1 C11.1 C13.2 C14.1 C16.2 C17.2 IN.A1 IN.A12 IN.B1 IN.B12 IN.G1 IN.G2 OUT.A1 OUT.A12 OUT.B1 OUT.B12 OUT.G1 OUT.G2 R2.1 R4.1 R6.1 R8.1 R13.1 R14.2 R20.2 U1.9 U1.11 U1.12 U1.17 U1.18 U1.19 U1.20 U1.21 U1.22 U2.1 U2.2 U2.7 U2.11 U2.13 U4.6 U4.9 U4.13 U4.V U5.2 | length 837.6
  Top Layer w10: IN.B1 IN.G1 ; IN.G2 IN.B12 ; U1.19 529.6,373.54 535.62,367.52 556.61,367.52 U1.9 ; U1.18 528.25,416.75 540.22,416.75 550.35,406.61 U1.11 U1.12 ; OUT.B1 OUT.G1 ; OUT.G2 OUT.B12 ; U2.1 U2.2 U2.13 1751.33,962.31 1752.39,963.38 1752.39,991.76 U2.11 1752.47,1000.54 1772,1020.07 R8.1@1772,1088
  Top Layer w30: v2(143,324) 146,327 224.17,327 C2.1 ; C1.1 331,531 331,611 v2(332,612) 332.5,612.5 332.5,679.5 v2(333,680) ; v2(419,667) 419,661.59 433.43,647.16 433.43,598.7 437.13,595 C4.1 452.87,595 456.57,598.7 456.57,634.16 484,661.59 v2(484,667)
NetBATT_1: BATT.1 C5.1 C8.1 C11.2 L1.2 L2.1 R5.2 R10.2 U1.10 U2.9 U2.10 U4.3 U4.4 | length 2496.8
  Top Layer w10: U2.9 U2.10 U2.10@1790.7,982 ; 2018,415 2025.37,422.37 2073.01,422.37 U4.4@2073.01,406.63
  Top Layer w30: L1.2 746.26,578.26 793,625 v1(793,626) ; R10.2 1367.39,600 v1(1435,600) ; BATT.1 1479.63,555.37 v1(1435,600) ; C11.2 1914,421 v1(1916,419) 1920,415 2018,415 ; L2.1 L2.1@1851.43,805.13 ; v1(1918,736) 1918,738.56 L2.1@1851.43,805.13 ; v1(1435,600) 1638.43,600 1842.81,804.38 1850.68,804.38 L2.1@1851.43,805.13
  Bottom Layer w30: v1(793,626) 841,626 907,692 1414,692 1437,669 1437,602 v1(1435,600) ; v1(1916,419) 1916,734 v1(1918,736)
NetBATT_2: BATT.2 C9.1 DSG.1 DSG.2 DSG.3 R12.2 U3.4 | length 1120.5
  Top Layer w10: DSG.3 DSG.2 DSG.1 ; U3.4 1192.32,530.32 1206.64,516 1208,516
  Top Layer w30: 1208,516 1230.02,493.98 R12.2 ; DSG.1 DSG.1@1228,228 ; v1(1290,226) 1288,228 DSG.1@1228,228 ; C9.1 1347.48,375.48 1322.44,350.44 R12.2 ; v1(1554,385) 1559.37,379.63 BATT.2@1559.37,283.46 ; DSG.1@1228,228 1230.02,230.02 R12.2
  Bottom Layer w30: v1(1290,226) 1449,385 v1(1554,385)
NetC3_1: C3.1 L1.1 U1.13 U1.14 | length 35.7
  Top Layer w10: U1.14 U1.13
  Top Layer w30: C3.1 557.56,594.06 C3.1@561.26,597.76 ; L1.1@650.79,525 L1.1
NetC3_2: C3.2 U1.15 | length 24
  Top Layer w20: C3.2@529.3,526.3 540.98,526.3 C3.2
NetC4_2: C4.2 U1.16 | length 13.1
  Top Layer w30: C4.2 452.87,535.94 C4.2@456.57,532.24
NetC9_2: C9.2 R10.1 U3.5 | length 218.7
  Top Layer w10: U3.5 1212,550 1213,551
  Top Layer w30: 1213,551 1245.55,551 1280.61,586.06 R10.1 1281.57,589.05 1281.57,488.95 C9.2
NetC10_2: C10.2 U4.2 U4.5 | length 384.5
  Top Layer w10: v1(2007,457) 2011.67,457 2030.55,438.12 U4.2@2073.01,438.12 ; 2037.88,390.88 U4.5@2073.01,390.88
  Top Layer w20: v1(2006,344) 2007.91,345.91 2007.91,360.91 2037.88,390.88
  Top Layer w30: C10.2 1919,309.98 1933.53,324.51 1986.51,324.51 v1(2006,344)
  Bottom Layer w30: v1(2006,344) 2006,357 2007,358 v1(2007,457)
NetC12_1: C12.1 C13.1 R15.1 U4.7 | length 464.8
  Top Layer w10: U4.7@2228.99,375.13 2295.87,375.13 2296,375 ; C12.1@2424.17,375.13 C12.1
  Top Layer w30: 2296,375 C12.1@2424.46,375 ; C12.1 2436.04,385.03 2407.48,356.47 C13.1 2412.48,268 2525,268 R15.1
NetC12_2: C12.2 C14.2 R14.1 U4.8 | length 1555.9
  Top Layer w10: U4.8@2228.99,390.88 2267.88,390.88 2280,403 2293,403 2294,404
  Top Layer w20: 2294,404 2355,404 2403,452
  Top Layer w30: 2403,452 2561,452 2583,430 v1(2583,391) 2505,391 C12.2 ; C14.2 v1(2506,86) R14.1
  Bottom Layer w30: v1(2506,86) 2571,151 2807,151 2903.57,247.57 2903.57,272.43 2787,389 2585,389 v1(2583,391)
NetCHA_1: CHA.1 CHA.2 CHA.3 R9.1 R11.1 R15.2 R20.1 | length 2730.1
  Top Layer w10: CHA.3 CHA.2
  Top Layer w30: R9.1 1023.94,613.11 1029,608.06 R11.1 1029,229.35 CHA.2 1029.41,234.41 v1(1077,282) ; R15.2 2715.04,263 2737.05,285.01 R20.1 2746.01,279 v1(2817,279)
  Bottom Layer w30: v1(1077,282) 1098,261 1098,88.57 1115.57,71 2169,71 2377,279 v1(2817,279)
NetCHA_4: CHA.4 R11.2 U3.2 | length 634.9
  Top Layer w10: 965,250 965,248.27 978.23,235.04 CHA.4 ; 1104,550 U3.2
  Top Layer w30: v1(869,465) 870,466 R11.2 952.23,262.77 965,250 ; v1(1085,551) 1103,551 1104,550
  Bottom Layer w30: v1(869,465) 955,551 v1(1085,551)
NetCHA_5: CHA.5 CHA.6 CHA.7 CHA.8 CHA.9 CHA.V DSG.5 DSG.6 DSG.7 DSG.8 DSG.9 DSG.V | length 361.3
  Top Layer w30: CHA.V@1016.61,142.76 1182.68,142.76 DSG.V@1186.61,138.82 ; CHA.V@1055,125.51 1144.29,125.51 DSG.V@1148.23,121.57 ; CHA.V@1055,160 1144.29,160 DSG.V@1148.23,156.06
NetCHG_1: CHG.1 R3.1 | length 128.3
  Top Layer w20: CHG.1 CHG.1@216.65,127.98 ; R3.1@311.73,113.57 R3.1
  Top Layer w30: CHG.1 206.38,114.95 310.36,114.95 R3.1@311.73,113.57
NetDSG_4: DSG.4 R12.1 U3.3 | length 315.7
  Top Layer w10: 1136,510 1136.38,510.38 U3.3 ; 1147,256 1147,226.23 DSG.4
  Top Layer w30: 1136,510 1153.25,492.75 R12.1 1147,344.19 1147,256
NetJ4_1: J4.1 R13.2 U4.1 | length 2848.8
  Top Layer w10: U4.1@2063.28,454.94 2063.28,480.28 2064,481
  Top Layer w30: 2064,481 2033.54,511.46 1978.7,511.46 1975,515.16 1975,534.84 v1(2323.16,883) ; v1(4020,816) 4020,996.97 J4.1
  Bottom Layer w30: v1(2323.16,883) 2544.38,1104.23 3249.62,1104.23 3251,1102.84 3932.16,1102.84 4020,1015 v1(4020,816)
NetJ4_2: J4.2 U4.12 | length 2329.1
  Top Layer w10: U4.12@2228.99,453.87 2228.99,505.99
  Top Layer w30: 2229,506 2229,688 2302,761 v1(2485.37,761) ; J4.2 3826,996.67 v1(3826,816)
  Bottom Layer w30: v1(2485.37,761) 3193.37,761 3441.37,1009 3807.43,1009 3825,991.43 3825,817 v1(3826,816)
NetJ4_3: J4.3 R16.2 | length 1521.5
  Top Layer w10: R16.2 2397.53,666.98 R16.2@2413.36,682.81
  Top Layer w30: R16.2 2620,661 v1(2659.02,700.02) ; J4.3 3629,996.82 v1(3629,812)
  Bottom Layer w30: v1(2659.02,700.02) 3538.02,700.02 3628,790 3628,811 v1(3629,812)
NetJ4_4: J4.4 R17.2 | length 1438.8
  Top Layer w30: R17.2 2661,556 2715.31,610.31 3423.31,610.31 3423.31,990.83 J4.4
NetL2_2: L2.2 U2.3 U2.14 | length 689.7
  Top Layer w10: U2.3 U2.14
  Top Layer w30: v1(1714,774) 1749.44,774 1780.57,805.13 L2.2 1780.57,818.25 L2.2@1779.96,818.86 ; v1(1714,819) 1779.82,819 L2.2@1779.96,818.86 ; L2.2@1780.26,812.98 L2.2@1779.96,818.86
  Bottom Layer w30: v2(1552,970) 1555.83,966.17 1555.83,905.17 1689,772 1712,772 v1(1714,774) ; v2(1614,972) 1614,902 1697,819 v1(1714,819)
NetR1_1: R1.1 R2.2 U1.7 | length 309.7
  Top Layer w10: 511.61,322.18 511.61,328.39 U1.7
  Top Layer w20: 511.61,322.18 519.95,313.84 526.16,313.84 533,307
  Top Layer w30: 533,307 551.11,307 628.43,229.69 635.31,229.69 R1.1 R2.2 R2.2@759.69,229.69
NetR3_2: R3.2 U1.3 | length 306.3
  Top Layer w10: R3.2 315.71,228.71 336,249 389.14,249 395,254.86 395,377 404.93,386.93 U1.3
NetR4_2: R4.2 U1.4
NetR5_1: R5.1 R6.2 U2.8 | length 541.6
  Top Layer w10: U2.8 1810.78,942.63 v1(1824.41,929)
  Top Layer w30: R6.2 2008.04,1006.16 2010,1004.2 R5.1 v1(2097,921)
  Bottom Layer w30: v1(1824.41,929) 1866.41,971 2047,971 v1(2097,921)
NetR7_1: R7.1 R8.2 U2.12
NetR9_2: R9.2 U3.6 | length 135.1
  Top Layer w10: 1183,593 1183,569.76 1183.08,569.68 U3.6
  Top Layer w30: R9.2 1156,620 1183,593
NetR16_1: R16.1 U4.11 | length 316.2
  Top Layer w10: U4.11@2228.99,438.12 2269.12,438.12 2281,450 2281,658.14 2286.86,664 2325.47,664 R16.1
NetR17_1: R17.1 U4.10 | length 215.7
  Top Layer w10: U4.10@2228.99,422.37 2298.37,422.37 2328.95,452.95 R17.1
"PWR IN": C1.2 IN.A4 IN.A9 IN.B4 IN.B9 R21.1 R22.1 U1.1 | length 1423.7
  Top Layer w10: 290.98,953.46 290.98,957.81 290.79,958 IN.A9 290.01,996.42 290.01,1023.09 292.76,1025.83 IN.B4 IN.B4@291.57,1043.66 ; IN.B9 385.04,1042.65 385.04,1028.04 388.43,1024.64 388.43,996.42 IN.A4 390.12,994.73 390.12,957.88
  Top Layer w30: R22.1 75,918 150,843 R21.1 ; 292.56,951.87 292.56,926 ; C1.2 174.83,457.17 119,513 119,595 292.56,768.56 R21.1 ; v1(338,916) 318,916 308,926 292.56,926 ; 396.98,951.02 413,935 v1(413,913) ; R21.1 292.56,926
  Bottom Layer w30: v1(338,916) 410,916 v1(413,913)
REGN: C2.2 CHG.2 R1.2 U1.2 | length 950.3
  Top Layer w30: v2(108,178) 113.41,178 134.41,199 CHG.2 210,204 210,246.43 227.57,264 254.72,264 284.49,293.77 284.49,314.49 C2.2 ; v2(636,73) 638,75 638,152.13 R1.2
  Bottom Layer w30: v2(108,178) 108,171 206,73 v2(636,73)
VOUT: C6.1 C7.1 C16.1 OUT.A4 OUT.A9 OUT.B4 OUT.B9 R7.2 R23.1 R24.1 U2.4 U2.5 U2.6 U5.1 U5.3 | length 3424.3
  Top Layer w10: 896.79,957.21 OUT.A9 896.01,996.42 896.01,1023.09 900.96,1028.04 900.96,1042.65 OUT.B4 ; OUT.B9 991.04,1042.65 991.04,1028.04 995.99,1023.09 995.99,996.42 OUT.A4 996.12,994.73 996.12,967.88 1006,958 1006,948 ; U2.4 1711.96,922.94 U2.4@1712.04,922.87
  Top Layer w30: R24.1@611.13,1193 611.13,1062.87 751,923 ; v2(841,923) 751,923 ; 896,948 896.13,947.87 R23.1@896.13,812.43 ; R23.1@896.13,795.28 R23.1@896.13,812.43 ; 1006,948 1020.59,948 1060.59,908 v2(1066,908) ; C6.1@1476,922.58 C6.1@1476.71,923.29 ; v1(2101,1204) 2107,1204 2163,1260 2226.2,1260 2290.63,1195.57 2294.05,1195.57 2294.8,1194.83 U5.1 ; v1(2215,1059) 2216,1060 C16.1 2294.05,1120.17 2294.8,1119.42 U5.3 ; 751,923 854.2,819.8 888.75,819.8 R23.1@896.13,812.43
  Bottom Layer w30: v2(841,923) 844.83,919.17 859.83,919.17 871,908 v2(1066,908) 1103,871 v2(1312,871) 1312,1110 1512,1310 1799,1310 ; v2(1832,1191) 1832,1277 1799,1310 ; v1(2101,1204) 2078.5,1181.5 2078.5,1177.5 ; v1(2215,1059) 2197,1059 2078.5,1177.5 ; 1799,1310 1946,1310 2078.5,1177.5
VOUT2: C17.1 J5.1 U5.5 | length 540.7
  Top Layer w30: C17.1 2380,1275.08 2421.25,1233.83 2421.25,1208.98 U5.5@2403.68,1191.4 ; U5.5 U5.5@2403.68,1191.4 ; J5.1 2801,1234 2586,1234 2543.4,1191.4 U5.5@2403.68,1191.4
pads on no net: IN.A2 IN.A3 IN.A6 IN.A7 IN.A8 IN.A10 IN.A11 IN.B2 IN.B3 IN.B6 IN.B7 IN.B8 IN.B10 IN.B11 IN.Shell J4.M1 J4.M2 J5.2 OUT.A2 OUT.A3 OUT.A6 OUT.A7 OUT.A8 OUT.A10 OUT.A11 OUT.B2 OUT.B3 OUT.B6 OUT.B7 OUT.B8 OUT.B10 OUT.B11 OUT.Shell U1.5 U1.6 U1.8 U3.1 U5.4

## Polygon pours and split planes (outlines as drawn)
GND on Top Layer "NetC4_2" (solid, pour order 78): 0,1430 4268,1430 4268,0 0,0
NetBATT_1 on Top Layer "NetBATT_1" (solid, pour order 47): 1764,973 1764,956 1766,954 1844,954 1844,772 1953,772 1953,1070 1954,1071 1955,1070 2008,1070 2008,1142 2007,1143 2006,1142 1865,1142 1865,973
NetBATT_1 on Top Layer "NetBATT_1" (solid, pour order 36): 720,568 718,566 718,392 547,392 545,394 544,393 544,379 575,379 606,280 791,275 796,568
NetC3_2 on Top Layer "NetC3_2" (solid, pour order 34): 495,554 587,554 587,487 588,486 586,484 500,484 500,439 486,439 486,545
NetC3_1 on Top Layer "NetC3_1" (solid, pour order 31): 673,482 674,483 674,629 673,628 514,628 514,582 517,579 600,579 600,474 599,475 511.61,475 511.61,438 580,438 625,483 673,483
NetC4_2 on Top Layer "NetC4_2" (solid, pour order 23): 398,551 478,551 478,450 445,450 445,486 398,486
NetR4_2 on Top Layer "NetR4_2" (solid, pour order 18): 455,376 455,303 506,303 506,241 413,241 413,375 414,376 434.5,376
NetR4_2 on Top Layer "REGN" (solid, pour order 17): 414,376 413,375 413,241 506,241 506,303 455,303 455,376 455,303 455,376
REGN on Top Layer "REGN" (solid, pour order 10): 287,412 287,280 382,280 382,400 449,400 449,412
"PWR IN" on Top Layer "NetC4_2" (solid, pour order 0): 230,480 410,480 410,432 460,432 460,415 455,420 230,420
NetR7_1 on Top Layer "NetC4_2" (solid, pour order 48): 1728,1234 1669,1234 1669,1031 1681,1019 1723,1019 1723,982 1742,982 1742,1023 1728,1037
NetL2_2 on Top Layer "NetC4_2" (solid, pour order 45): 1516,932 1516,1026 1655,1026 1655,951 1724,951 1724,932
VOUT on Top Layer "VOUT" (solid, pour order 44): 1271,927 1271,819 1659,819 1667,827 1667,884 1756,884 1761,889 1761,927
VOUT on Top Layer "NetC4_2" (solid, pour order 41): 1759,1232 1759,1151 1870,1151 1870,1232
GND on Bottom Layer "NetC4_2" (solid, pour order 79): 0,1430 4268,1430 4268,0 0,0

## Silkscreen, mask and mechanical layers (free items; w line width, h text height)
Top Overlay:
  text "Power System" at 1249,1354.33 h40
  text "Battery Charger" at 1820,1350.33 h40
  text "&" at 1750,1348 h40
  text "ECEN 403/404" at 3611,251 h45
  text "Designed By:" at 3607,178 h45
  text "Vanessa Zerpa" at 3605,101 h45
Mechanical 1:
  lines w0: 0,0 0,1430 ; 0,0 4268,0 ; 0,0 0,1430 ; 0,0 4268,0 ; 0,1430 4268,1430 ; 0,1430 4268,1430 ; 4268,0 4268,1430 ; 4268,0 4268,1430

## Text inside footprints (layer, text, board x,y; h text height)
IN: Top 3D Body "PCB Edge" at 406.93,1449.57 h24 r180
OUT: Top 3D Body "PCB Edge" at 1012.93,1449.57 h24 r180
U4: Top Overlay "*" at 2077,494 h50; Mechanical 13 "*" at 2052.53,456.24 h50